# Altium PCB PekeeCarte3.PcbDoc
Units mil, origin at the board's own origin, x right, y up, seen from the top; angles counter-clockwise.
Board outline 2850 x 1525 mil, 2 copper layers (Top Layer, Bottom Layer); 12 components, 11 nets, 106 pads, 0 vias.
Unrouted connection lines stored in the file: 3.
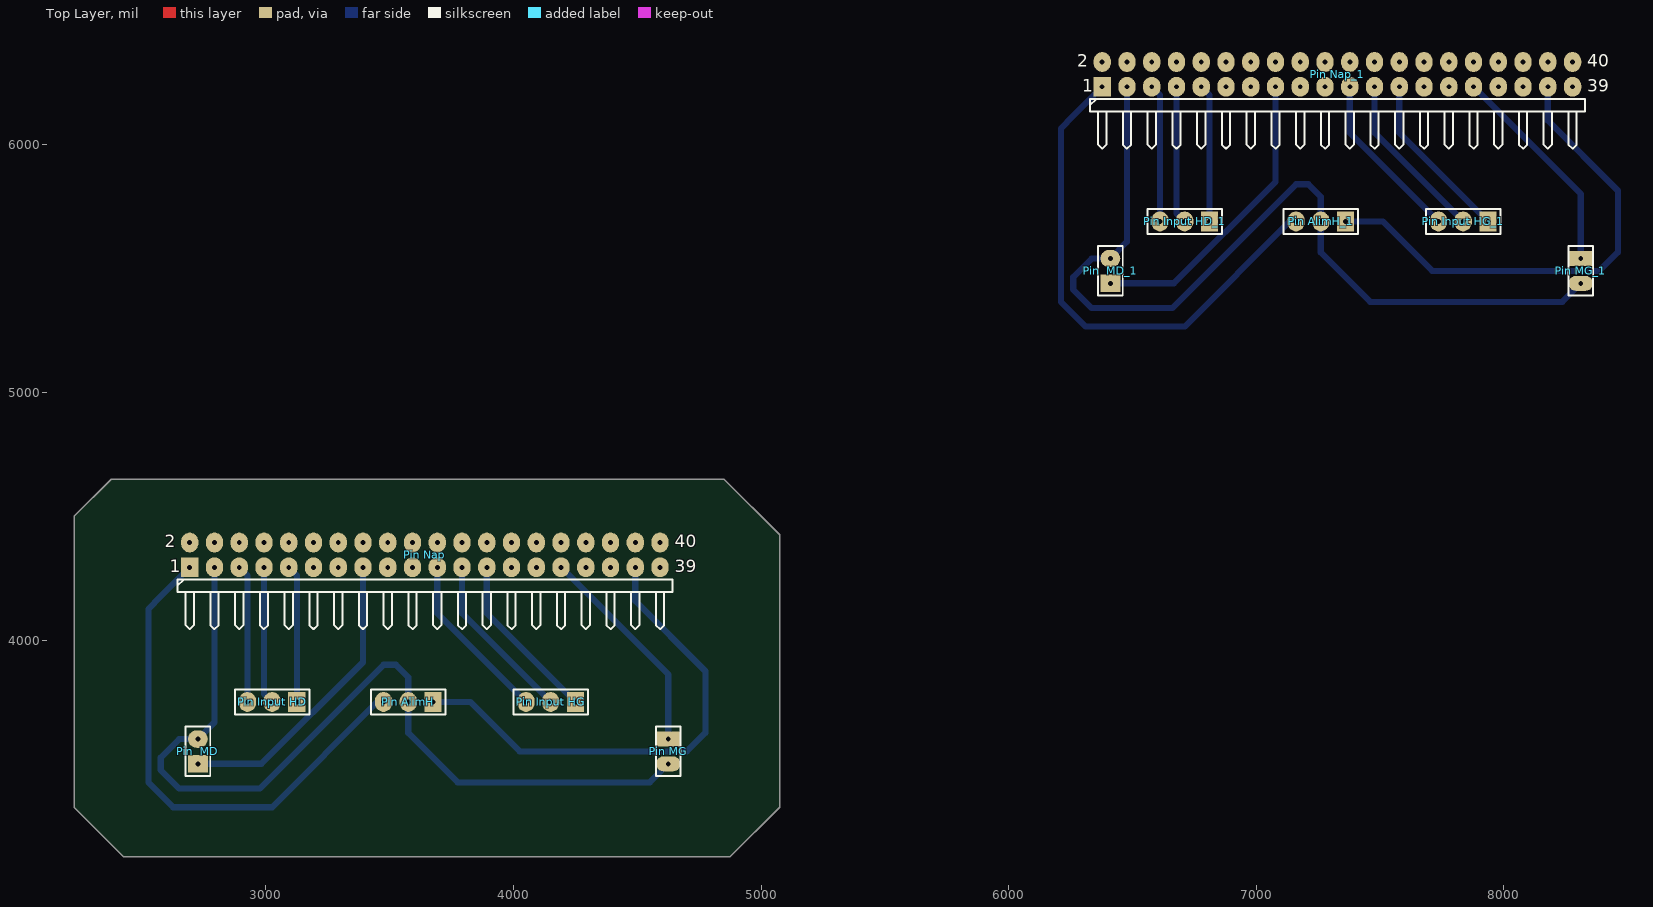
[diagram p0: Top Layer view]
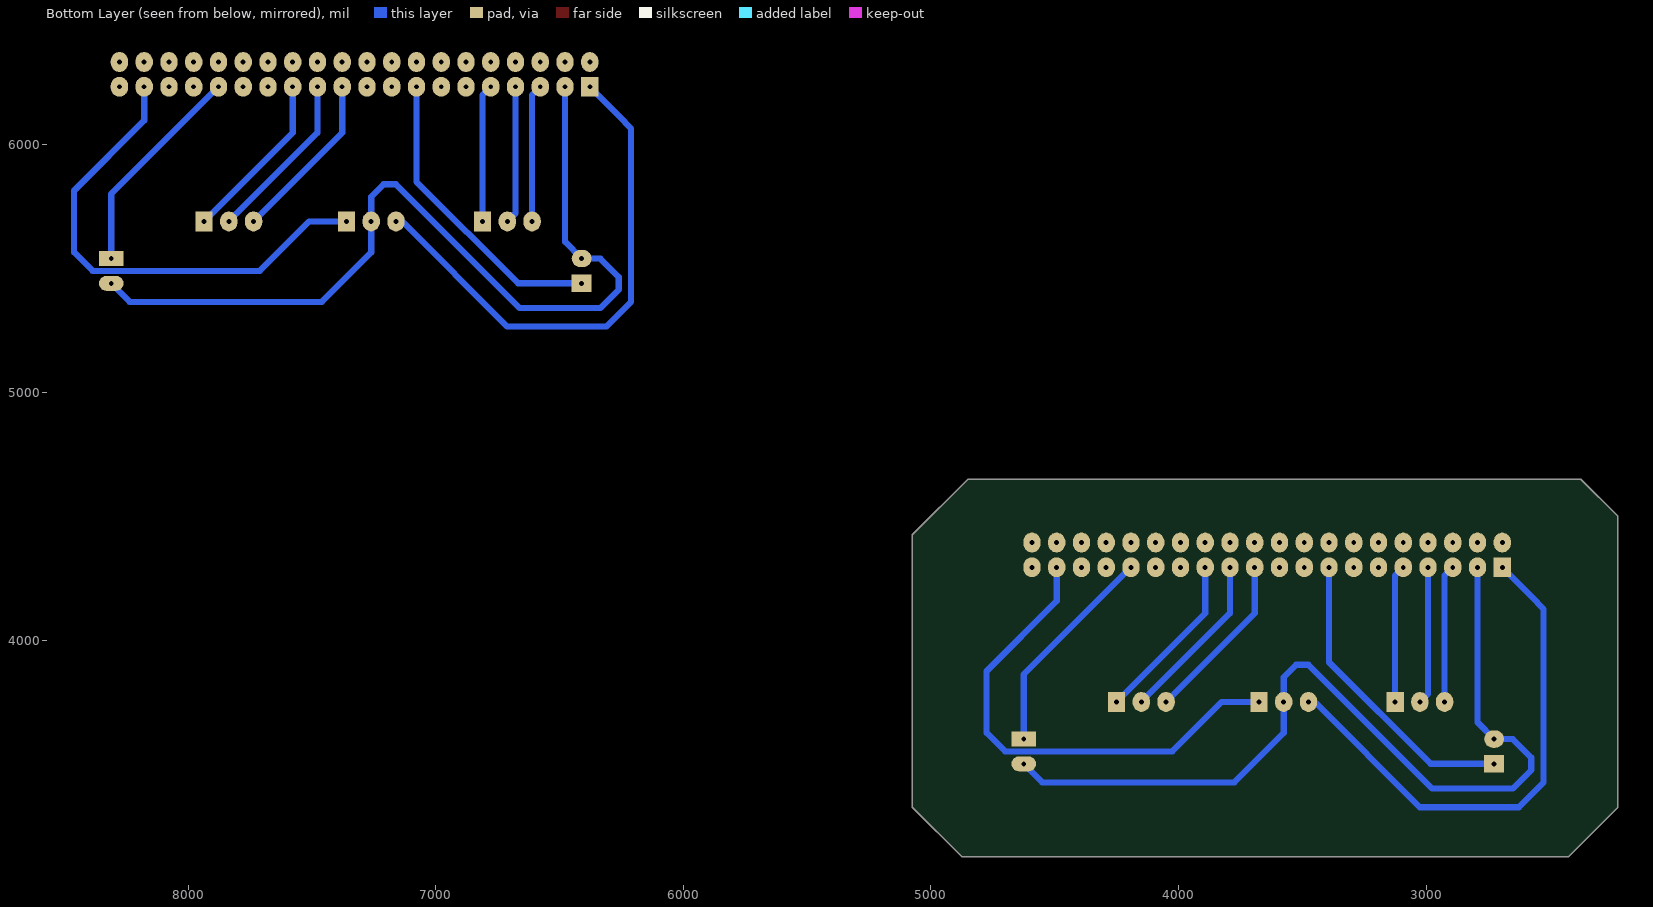
[diagram p1: Bottom Layer view, seen from below]

## Layer stack, top to bottom
Top Solder: solder mask 0.4, Solder Resist, Dk 3.5
Top Layer: signal copper 1.4
Dielectric 1: dielectric 12.6, FR-4, Dk 4.8
Bottom Layer: signal copper 1.4
Bottom Solder: solder mask 0.4, Solder Resist, Dk 3.5

## Board outline
2225,3325 2225,4500 2375,4650 4850,4650 5075,4425 5075,3325 4875,3125 2425,3125

## Design rules (kind name [scope] priority, off if disabled: settings)
AssemblyTestPointUsage [All] p1 off:
AssemblyTestpoint [All] p1 off: testpointundercomponent=TRUE minsize=40 maxsize=100 preferedsize=60 minholesize=0 maxholesize=40 preferedholesize=32 testpointgrid=1 usegrid=TRUE gridtolerance=0.01 allowsidetop=TRUE allowsidebottom=TRUE
Clearance [All] p1 off: gap=10
ComponentClearance [All] p1 off: gap=10 collisioncheckmode=3 verticalgap=10 showdistances=FALSE
DiffPairsRouting [All] p1 off: maxlimit=10 minlimit=10 mostfreqgap=10 toplayer_minwidth=15 toplayer_maxwidth=15 toplayer_prefwidth=15 bottomlayer_minwidth=15 bottomlayer_maxwidth=15 bottomlayer_prefwidth=15 maxuncoupledlength=500
FabricationTestPointUsage [All] p1 off: valid=0 allowmultiple=FALSE
FabricationTestpoint [All] p1 off: side=3 testpointundercomponent=TRUE minsize=40 maxsize=100 preferedsize=60 minholesize=0 maxholesize=40 preferedholesize=32 testpointgrid=1 allowsidetop=TRUE allowsidebottom=TRUE usegrid=TRUE gridtolerance=0.01
FanoutControl Fanout_BGA [IsBGA] p1 off: bgadir=Out bgaviamode=Centered fanoutstyle=Auto fanoutdirection=Alternating viagrid=1 // Fanout_BGA (Default Rule)
FanoutControl Fanout_LCC [IsLCC] p2 off: bgadir=Out bgaviamode=Centered fanoutstyle=Auto fanoutdirection=Alternating viagrid=1 // Fanout_LCC (Default Rule)
FanoutControl Fanout_SOIC [IsSOIC] p3 off: bgadir=Out bgaviamode=Centered fanoutstyle=Auto fanoutdirection=Alternating viagrid=1 // Fanout_SOIC (Default Rule)
FanoutControl Fanout_Small [(CompPinCount < 5)] p4 off: bgadir=Out bgaviamode=Centered fanoutstyle=Auto fanoutdirection=OutThenIn viagrid=1 // Fanout_Small (Default Rule)
FanoutControl Fanout_Default [All] p5 off: bgadir=Out bgaviamode=Centered fanoutstyle=Auto fanoutdirection=Alternating viagrid=1 // Fanout_Default (Default Rule)
Height [All] p1 off: minheight=0 maxheight=1000 prefheight=500
HoleSize [All] p1 off: absolutevalues=TRUE maxlimit=100 minlimit=1 maxpercent=80.000 minpercent=20.000
HoleToHoleClearance [All] p1 off: gap=10 allowstackedmicrovias=TRUE
LayerPairs [All] p1 off: enforce=TRUE
MinimumSolderMaskSliver [All] p1 off: minsoldermaskwidth=10
NetAntennae [All] p1 off: netantennaetolerance=0
PasteMaskExpansion [All] p1 off: expansion=0
PlaneClearance [All] p1 off: clearance=20
PlaneConnect [All] p1 off: planeconnectstyle=Relief reliefexpansion=20 reliefentries=4 reliefconductorwidth=10 reliefairgap=10
PolygonConnect [All] p1 off: connectstyle=Relief reliefconductorwidth=10 reliefentries=4 polygonreliefangle="90 Angle" airgapwidth=10
RoomDefinition PekeeCarte2 [InComponentClass('PekeeCarte2')] p1 off: confinementstyle=ConfineIn formatcopy=TRUE lockcomponents=FALSE outline 7045,1060 10370,1060 10370,3355 7045,3355
RoutingCorners [All] p1 off: cornerstyle=45-Degree minsetback=100 maxsetback=100
RoutingLayers [All] p1 off: top layer_v5=FALSE bottom layer_v5=TRUE
RoutingPriority [All] p1 off: routingpriority=0
RoutingTopology [All] p1 off: topology=Shortest
RoutingVias [All] p1 off: holewidth=28 width=50 viastyle="Through Hole" minholewidth=28 minwidth=50 maxholewidth=28 maxwidth=50
ShortCircuit [All] p1 off: allowed=FALSE
SilkToBoardRegionClearance [All] p1 off:
SilkToSilkClearance [All] p1 off: silktosilkclearance=10
SilkToSolderMaskClearance [IsPad] p1 off: minsilkscreentomaskgap=10 clearancetoexposedcopper=TRUE
SolderMaskExpansion [All] p1 off: expansion=4
UnRoutedNet [All] p1 off:
Width [All] p1 off: maxlimit=25 minlimit=25 preferedwidth=25

## Classes and differential pairs
component class PekeeCarte2: "Pin  MD" "Pin AlimH" "Pin Input HD" "Pin Input HG" "Pin MG" "Pin Nap"

## Components (designator, comment, footprint, x,y, rotation, side; value= is the part's Value field where it differs from the comment)
"Pin  MD" "Header 2" HDR1X2#1 2725,3500 r90 top
"Pin  MD_1" "Header 2" HDR1X2#1 6411,5441 r90 top (schematic designator "Pin  MD")
"Pin AlimH" "Header 3" HDR1X3 3675,3750 r180 top
"Pin AlimH_1" "Header 3" HDR1X3 7361,5691 r180 top (schematic designator "Pin AlimH")
"Pin Input HD" "Header 3" HDR1X3 3125,3750 r180 top
"Pin Input HD_1" "Header 3" HDR1X3 6811,5691 r180 top (schematic designator "Pin Input HD")
"Pin Input HG" "Header 3" HDR1X3 4250,3750 r180 top
"Pin Input HG_1" "Header 3" HDR1X3 7936,5691 r180 top (schematic designator "Pin Input HG")
"Pin MG" "Header 2" HDR1X2#2 4625,3600 r270 top
"Pin MG_1" "Header 2" HDR1X2#2 8311,5541 r270 top (schematic designator "Pin MG")
"Pin Nap" "Header 20X2H" HDR2X20H 2692,4294 r0 top
"Pin Nap_1" "Header 20X2H" HDR2X20H 6378,6235 r0 top (schematic designator "Pin Nap")

## Footprints (in the part's own frame and the unit in brackets; to place one, negate y for a bottom-side part, rotate by r counter-clockwise, add the part's x,y. Pads: shape width x height; smd on the part's side, far side on the other; paste and mask are expansions set on the pad)
HDR1X2#1 [mil] "Connector; Header; 2 Position"
  rect 70x80 hole 20: 1(0,0)
  oval 70x80 hole 20: 2(100,0)
  silkscreen extent -50,-50 150,50
HDR1X2#2 [mil] "Connector; Header; 2 Position"
  rect 60x100 hole 20: 1(0,0)
  oval 60x100 hole 20: 2(100,0)
  silkscreen extent -50,-50 150,50
HDR1X3 [mil] "Connector; Header; 3 Position"
  rect 70x80 hole 20: 1(0,0)
  oval 70x80 hole 20: 2(100,0) 3(200,0)
  silkscreen extent -50,-50 250,50
HDR2X20H [mil] "Connector; Header; 20x2 Position; Right Angle"
  rect 70x80 hole 20: 1(0,0)
  oval 70x80 hole 20: 2(0,100) 3(100,0) 4(100,100) 5(200,0) 6(200,100) 7(300,0) 8(300,100) 9(400,0) 10(400,100) 11(500,0) 12(500,100) 13(600,0) 14(600,100) 15(700,0) 16(700,100) 17(800,0) 18(800,100) 19(900,0) 20(900,100) 21(1000,0) 22(1000,100) 23(1100,0) 24(1100,100) 25(1200,0) 26(1200,100) 27(1300,0) 28(1300,100) 29(1400,0) 30(1400,100) 31(1500,0) 32(1500,100) 33(1600,0) 34(1600,100) 35(1700,0) 36(1700,100) 37(1800,0) 38(1800,100) 39(1900,0) 40(1900,100)
  silkscreen extent -50,-250 1950,-50

## Part data
"Pin  MD" "Pin  MD_1" "Pin MG" "Pin MG_1": "Header, 2-Pin"
"Pin AlimH" "Pin AlimH_1" "Pin Input HD" "Pin Input HD_1" "Pin Input HG" "Pin Input HG_1": "Header, 3-Pin"
"Pin Nap" "Pin Nap_1": "Header, 20-Pin, Dual row, Right Angle"

## Nets (pads, with @x,y where several pads share a name; then routed paths per layer and width w, separated by ;. In a path a pad name is that pad's centre, name@x,y a point inside that pad or via, vN(x,y) a via of type N, cw(c..) or ccw(c..) an arc to the next point about the centre after c; other vN are vias at no path point)
+5V: "Pin AlimH.3" "Pin Nap.1" | length 2105.6
  Bottom Layer w25: 2692,4294 2550,4152 2550,4150 2525,4125 2525,3425 2625,3325 3025,3325 3450,3750 3475,3750
BD: "Pin  MD.1" "Pin Nap.15" | length 1220.7
  Bottom Layer w25: 2725,3500 2981.82,3500 3392,3910.18 3392,4294
BG: "Pin MG.1" "Pin Nap.31" | length 873.4
  Bottom Layer w25: 4192,4294 4625,3861 4625,3600
EA: "Pin Input HG.1" "Pin Nap.25" | length 692.3
  Bottom Layer w25: 3892,4294 3892,4108 4250,3750
EB: "Pin Input HD.1" "Pin Nap.9" | length 557.7
  Bottom Layer w25: 3092,4294 3125,4261 3125,3750
GND: "Pin  MD.2" "Pin AlimH.2" "Pin MG.2" "Pin Nap.3" "Pin Nap.11" "Pin Nap.27" "Pin Nap.39" | length 3600.6
  Bottom Layer w25: 2792,4294 2792,3667 2725,3600 2650,3600 2575,3525 2575,3475 2650,3400 2975,3400 3475,3900 3525,3900 3575,3850 3575,3750 3575,3625 3775,3425 4550,3425 4625,3500
I1: "Pin Input HG.3" "Pin Nap.21" | length 692.3
  Bottom Layer w25: 3692,4294 3692,4108 4050,3750
I2: "Pin Input HG.2" "Pin Nap.23" | length 692.3
  Bottom Layer w25: 3792,4294 3792,4108 4150,3750
I3: "Pin Input HD.3" "Pin Nap.5" | length 557.7
  Bottom Layer w25: 2892,4294 2925,4261 2925,3750
I4: "Pin Input HD.2" "Pin Nap.7" | length 557.7
  Bottom Layer w25: 2992,4294 2992,3783 3025,3750
VIN: "Pin AlimH.1" "Pin Nap.37" | length 2000.1
  Bottom Layer w23: 4550,3550 4700,3550
  Bottom Layer w25: 3675,3750 3825,3750 4025,3550 4550,3550 ; 4492,4294 4492,4158 4775,3875 4775,3625 4700,3550
pads on no net: "Pin  MD_1.1" "Pin  MD_1.2" "Pin AlimH_1.1" "Pin AlimH_1.2" "Pin AlimH_1.3" "Pin Input HD_1.1" "Pin Input HD_1.2" "Pin Input HD_1.3" "Pin Input HG_1.1" "Pin Input HG_1.2" "Pin Input HG_1.3" "Pin MG_1.1" "Pin MG_1.2" "Pin Nap.2" "Pin Nap.4" "Pin Nap.6" "Pin Nap.8" "Pin Nap.10" "Pin Nap.12" "Pin Nap.13" "Pin Nap.14" "Pin Nap.16" "Pin Nap.17" "Pin Nap.18" "Pin Nap.19" "Pin Nap.20" "Pin Nap.22" "Pin Nap.24" "Pin Nap.26" "Pin Nap.28" "Pin Nap.29" "Pin Nap.30" "Pin Nap.32" "Pin Nap.33" "Pin Nap.34" "Pin Nap.35" "Pin Nap.36" "Pin Nap.38" "Pin Nap.40" "Pin Nap_1.1" "Pin Nap_1.2" "Pin Nap_1.3" "Pin Nap_1.4" "Pin Nap_1.5" "Pin Nap_1.6" "Pin Nap_1.7" "Pin Nap_1.8" "Pin Nap_1.9" "Pin Nap_1.10" "Pin Nap_1.11" "Pin Nap_1.12" "Pin Nap_1.13" "Pin Nap_1.14" "Pin Nap_1.15" "Pin Nap_1.16" "Pin Nap_1.17" "Pin Nap_1.18" "Pin Nap_1.19" "Pin Nap_1.20" "Pin Nap_1.21" "Pin Nap_1.22" "Pin Nap_1.23" "Pin Nap_1.24" "Pin Nap_1.25" "Pin Nap_1.26" "Pin Nap_1.27" "Pin Nap_1.28" "Pin Nap_1.29" "Pin Nap_1.30" "Pin Nap_1.31" "Pin Nap_1.32" "Pin Nap_1.33" "Pin Nap_1.34" "Pin Nap_1.35" "Pin Nap_1.36" "Pin Nap_1.37" "Pin Nap_1.38" "Pin Nap_1.39" "Pin Nap_1.40"
copper on no net: | length 13550.3
  Bottom Layer w23: 8236,5491 8386,5491
  Bottom Layer w25: 6378,6235 6236,6093 6236,6091 6211,6066 6211,5366 6311,5266 6711,5266 7136,5691 7161,5691 ; 6411,5441 6667.82,5441 7078,5851.18 7078,6235 ; 6478,6235 6478,5608 6411,5541 6336,5541 6261,5466 6261,5416 6336,5341 6661,5341 7161,5841 7211,5841 7261,5791 7261,5691 7261,5566 7461,5366 8236,5366 8311,5441 ; 6578,6235 6611,6202 6611,5691 ; 6678,6235 6678,5724 6711,5691 ; 6778,6235 6811,6202 6811,5691 ; 7361,5691 7511,5691 7711,5491 8236,5491 ; 7378,6235 7378,6049 7736,5691 ; 7478,6235 7478,6049 7836,5691 ; 7578,6235 7578,6049 7936,5691 ; 7878,6235 8311,5802 8311,5541 ; 8178,6235 8178,6099 8461,5816 8461,5566 8386,5491

## Silkscreen, mask and mechanical layers (free items; w line width, h text height)
Mechanical 1:
  lines w10: 2400,4650 2375,4650 ; 6086,6591 6061,6591 ; 2375,4650 2225,4500 2225,3325 2425,3125 4875,3125 5075,3325 5075,4425 4850,4650 2375,4650 ; 6061,6591 8536,6591 8761,6366 8761,5266 8561,5066 6111,5066 5911,5266 5911,6441 6061,6591

## Text inside footprints (layer, text, board x,y; h text height)
"Pin Nap": Top Overlay "2" at 2592,4374 h50; Top Overlay "1" at 2612,4274 h50; Top Overlay "39" at 4652,4274 h50; Top Overlay "40" at 4652,4374 h50
"Pin Nap_1": Top Overlay "2" at 6278,6315 h50; Top Overlay "1" at 6298,6215 h50; Top Overlay "39" at 8338,6215 h50; Top Overlay "40" at 8338,6315 h50